# EAGLE board Validation CircuitThroughHoleMolexCondensed (EAGLE 8.3.1)
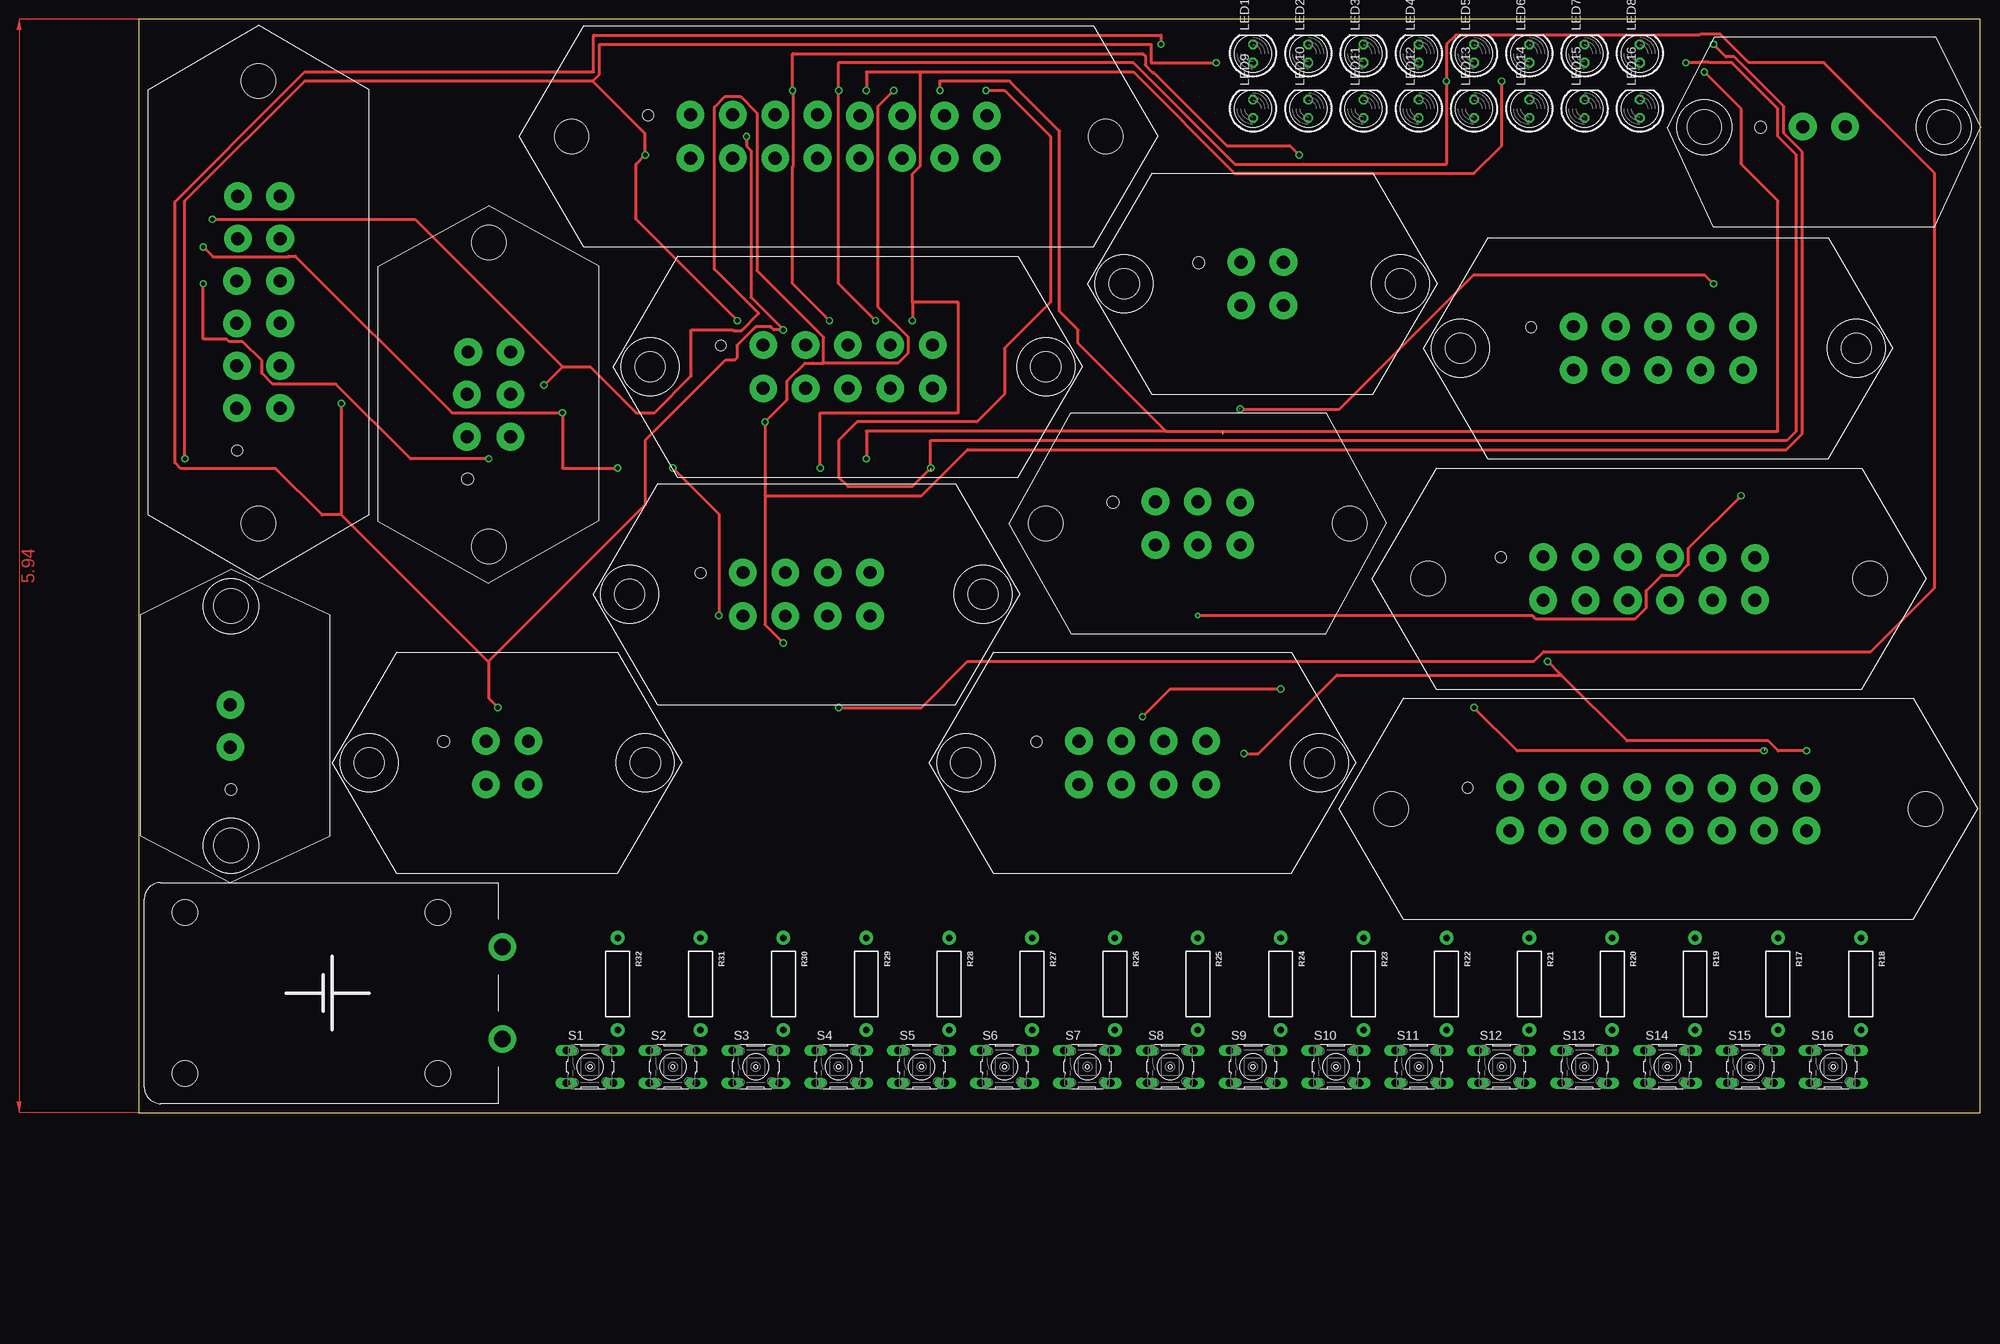
[diagram p0: board, top side]
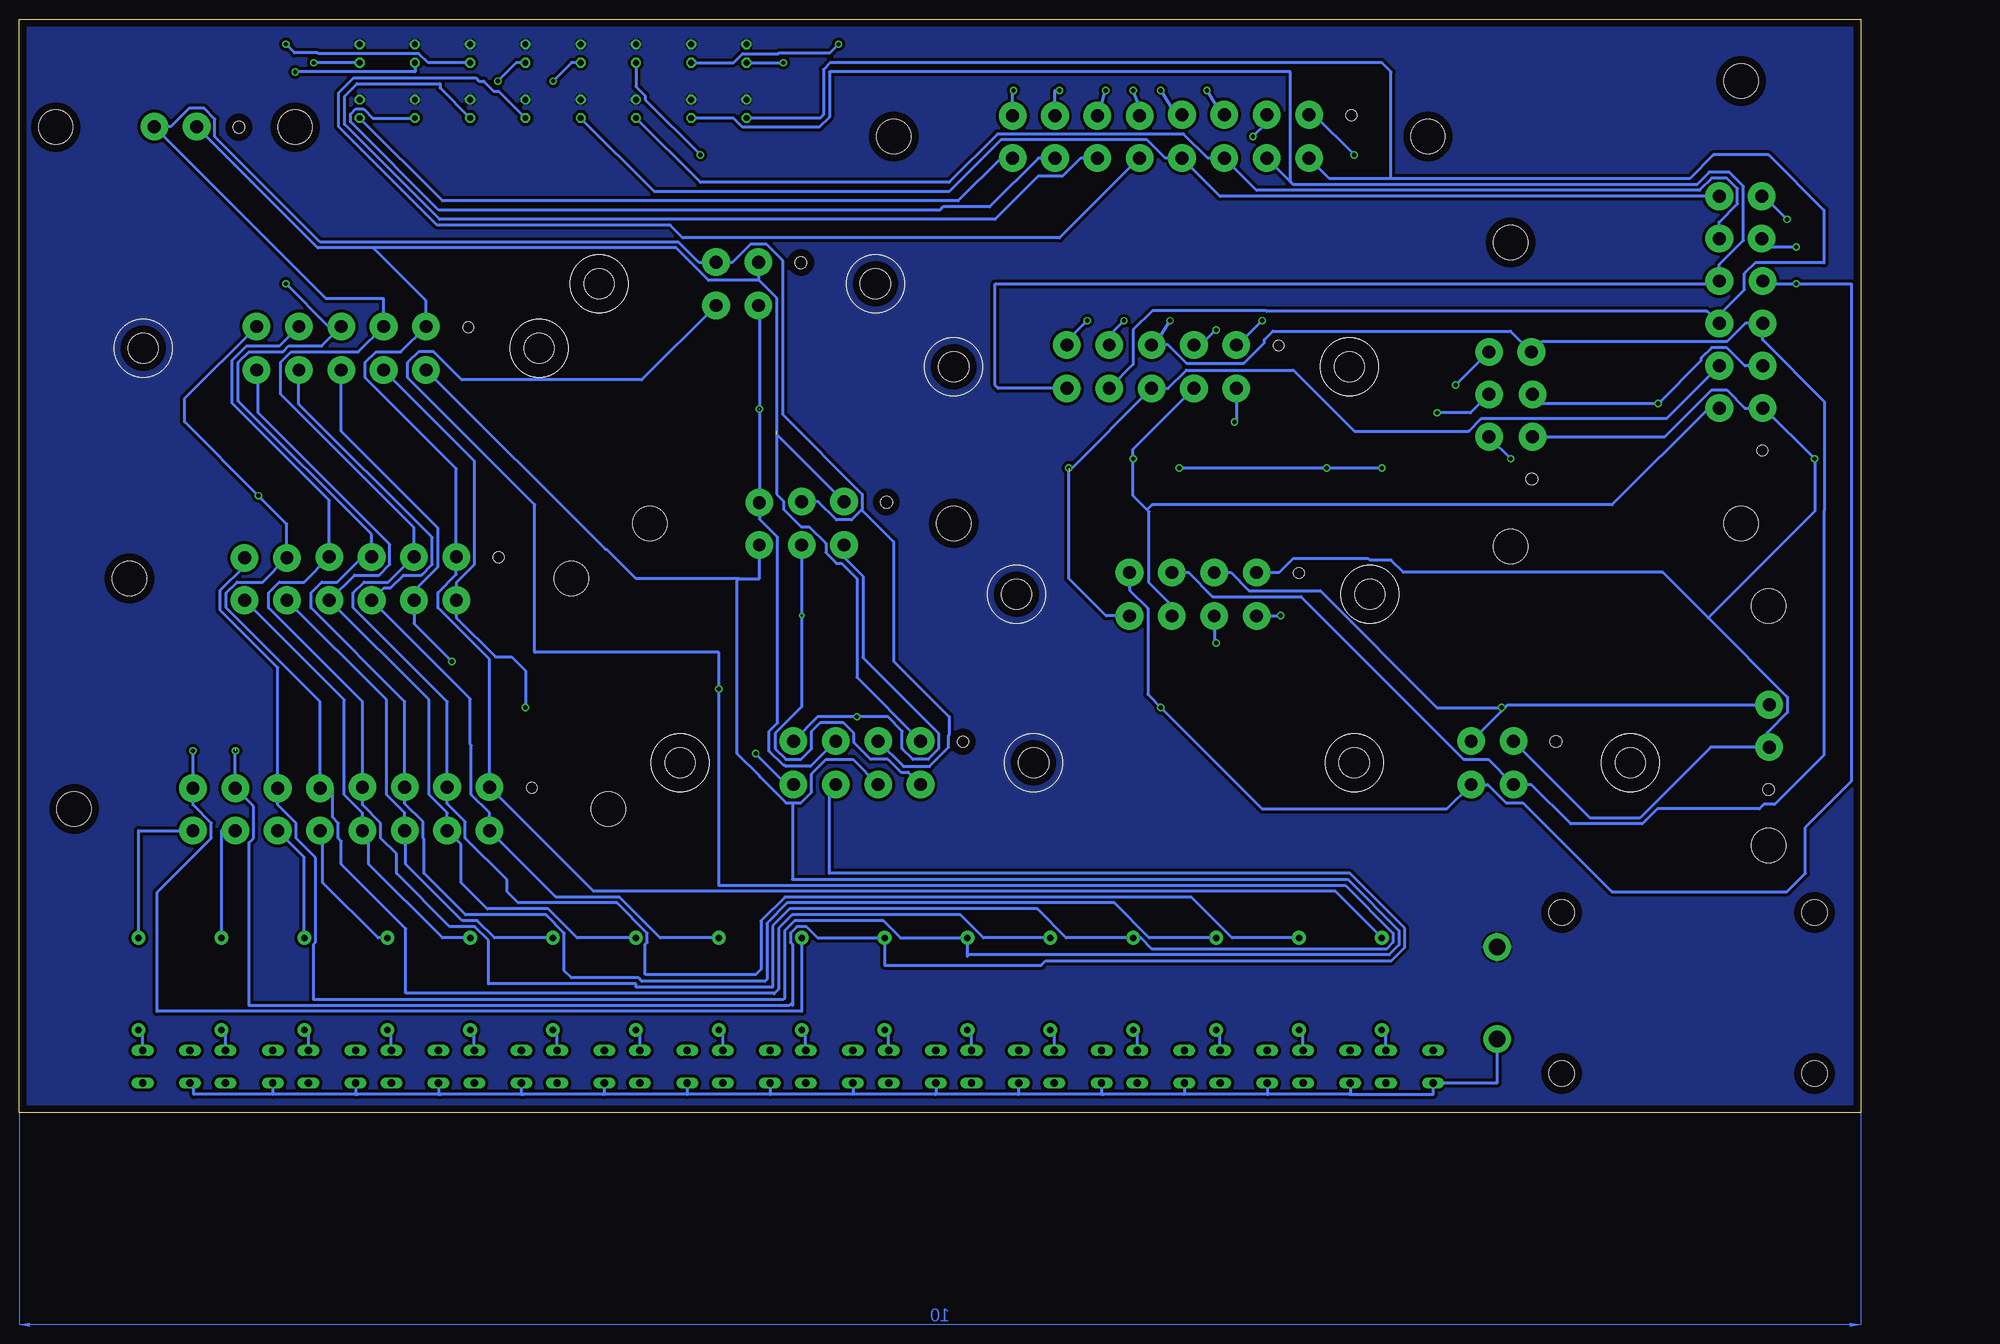
[diagram p1: board, bottom side, seen from below]

Size 253.98 x 150.8 mm. Coordinates in mm from the lower left corner, seen from the top.
Outline: 0,0 253.98,0 253.98,150.8 0,150.8 0,0
Copper layers (1*16): Top 0.035mm / dielectric 1.5mm / Bottom 0.035mm
Design rules "default *": minimum track width 6mil, minimum drill 0.35mm, track to track 16mil, track to pad 16mil, pad to pad 16mil, via to via 16mil, smd to smd 16mil, copper to edge 40mil, drill to drill 6mil, minimum pad ring 10mil, minimum via ring 8mil, stop-mask expansion 4mil, vias tented up to drill 0mil, thermal gap 10mil

## Footprints (pad centres in the part's own frame; a part is rotated, then mirrored left to right if it is on the bottom)
LED-5MM = drill 0.813 octagon: A -1.27,0; K 1.27,0
AXIAL-0.5 = drill 0.9 pad 1.88: P$1 -6.35,0; P$2 6.35,0
B3F-10XX = drill 1.016 long: 1 -3.251,2.261; 2 3.251,2.261; 3 -3.251,-2.261; 4 3.251,-2.261
MX150L_VERTICAL-4 = drill 1.778 pad 3.81: 1 -2.921,2.997; 2 2.921,2.997; 3 -2.921,-2.997; 4 2.921,-2.997 | hole 4.191: -19.05,0; 19.05,0 | hole 1.651: -8.763,2.921
MX150L_VERTICAL-6 = drill 1.778 pad 3.81: 1 -5.842,2.997; 2 0,2.997; 3 5.842,2.845; 4 -5.842,-2.997; 5 0,-2.997; 6 5.842,-2.997 | hole 1.651: -11.684,2.921 | hole 4.775: -20.955,0; 20.955,0
MX150L_VERTICAL-2 = drill 1.778 pad 3.81: 1 -2.921,0.076; 2 2.921,0.076 | hole 1.651: -8.763,0 | hole 4.775: -16.51,0; 16.51,0
MX150L_VERTICAL-8 = drill 1.778 pad 3.81: 1 -8.763,2.997; 2 -2.921,2.997; 3 2.921,2.997; 4 8.763,2.997; 5 -8.763,-2.997; 6 -2.921,-2.997; 7 2.921,-2.997; 8 8.763,-2.997 | hole 4.191: -24.371,0; 24.371,0 | hole 1.524: -14.605,2.921
MX150L_VERTICAL-10 = drill 1.778 pad 3.81: 1 -11.684,2.997; 2 -5.842,2.997; 3 0,2.997; 4 5.842,2.997; 5 11.684,2.997; 6 -11.684,-2.997; 7 -5.842,-2.997; 8 0,-2.997; 9 5.842,-2.997; 10 11.684,-2.997 | hole 4.191: -27.292,0; 27.292,0 | hole 1.524: -17.526,2.921
MX150L_VERTICAL-12 = drill 1.778 pad 3.81: 1 -14.605,2.997; 2 -8.763,2.997; 3 -2.921,2.997; 4 2.921,2.997; 5 8.763,2.845; 6 14.605,2.845; 7 -14.605,-2.997; 8 -8.763,-2.997; 9 -2.921,-2.997; 10 2.921,-2.997; 11 8.763,-2.997; 12 14.605,-2.997 | hole 1.524: -20.447,2.921 | hole 4.775: 30.48,0; -30.48,0
MX150L-VERTICAL-16 = drill 1.778 pad 3.81: 1 -20.447,2.997; 2 -14.605,2.997; 3 -8.763,2.997; 4 -2.921,2.997; 5 2.921,2.845; 6 8.763,2.845; 7 14.605,2.845; 8 20.447,2.845; 9 -20.447,-2.997; 10 -14.605,-2.997; 11 -8.763,-2.997; 12 -2.921,-2.997; 13 2.921,-2.997; 14 8.763,-2.997; 15 14.605,-2.997; 16 20.447,-2.997 | hole 1.524: -26.289,2.921 | hole 4.775: -36.83,0; 36.83,0
1291-79 = drill 2.286 pad 3.81: + 43.815,-6.35; - 43.815,6.35 | hole 3.556: 0,11.113; 0,-11.113; 34.925,-11.113; 34.925,11.113

## Placement (x,y rotation side)
LED1  [LED-5MM]  153.67,146.05 90 top
LED2  [LED-5MM]  161.29,146.05 90 top
LED3  [LED-5MM]  168.91,146.05 90 top
LED4  [LED-5MM]  176.53,146.05 90 top
LED5  [LED-5MM]  184.15,146.05 90 top
LED6  [LED-5MM]  191.77,146.05 90 top
LED7  [LED-5MM]  199.39,146.05 90 top
LED8  [LED-5MM]  207.01,146.05 90 top
LED9  [LED-5MM]  153.67,138.43 90 top
LED10  [LED-5MM]  161.29,138.43 90 top
LED11  [LED-5MM]  168.91,138.43 90 top
LED12  [LED-5MM]  176.53,138.43 90 top
LED13  [LED-5MM]  184.15,138.43 90 top
LED14  [LED-5MM]  191.77,138.43 90 top
LED15  [LED-5MM]  199.39,138.43 90 top
LED16  [LED-5MM]  207.01,138.43 90 top
R17  [AXIAL-0.5]  226.06,17.78 270 top
R18  [AXIAL-0.5]  237.49,17.78 270 top
R19  [AXIAL-0.5]  214.63,17.78 270 top
R20  [AXIAL-0.5]  203.2,17.78 270 top
R21  [AXIAL-0.5]  191.77,17.78 270 top
R22  [AXIAL-0.5]  180.34,17.78 270 top
R23  [AXIAL-0.5]  168.91,17.78 270 top
R24  [AXIAL-0.5]  157.48,17.78 270 top
R25  [AXIAL-0.5]  146.05,17.78 270 top
R26  [AXIAL-0.5]  134.62,17.78 270 top
R27  [AXIAL-0.5]  123.19,17.78 270 top
R28  [AXIAL-0.5]  111.76,17.78 270 top
R29  [AXIAL-0.5]  100.33,17.78 270 top
R30  [AXIAL-0.5]  88.9,17.78 270 top
R31  [AXIAL-0.5]  77.47,17.78 270 top
R32  [AXIAL-0.5]  66.04,17.78 270 top
S1  [B3F-10XX]  62.23,6.35 0 top
S2  [B3F-10XX]  73.66,6.35 0 top
S3  [B3F-10XX]  85.09,6.35 0 top
S4  [B3F-10XX]  96.52,6.35 0 top
S5  [B3F-10XX]  107.95,6.35 0 top
S6  [B3F-10XX]  119.38,6.35 0 top
S7  [B3F-10XX]  130.81,6.35 0 top
S8  [B3F-10XX]  142.24,6.35 0 top
S9  [B3F-10XX]  153.67,6.35 0 top
S10  [B3F-10XX]  165.1,6.35 0 top
S11  [B3F-10XX]  176.53,6.35 0 top
S12  [B3F-10XX]  187.96,6.35 0 top
S13  [B3F-10XX]  199.39,6.35 0 top
S14  [B3F-10XX]  210.82,6.35 0 top
S15  [B3F-10XX]  222.25,6.35 0 top
S16  [B3F-10XX]  233.68,6.35 0 top
U$1  MX150L-4PINS  [MX150L_VERTICAL-4]  154.94,114.3 0 top
U$2  MX150L-6PINS  [MX150L_VERTICAL-6]  146.05,81.28 0 top
U$3  MX150L-2PINS  [MX150L_VERTICAL-2]  232.41,135.89 0 top
U$4  MX150L-8PINS  [MX150L_VERTICAL-8]  138.43,48.26 0 top
U$5  MX150L-10PINS  [MX150L_VERTICAL-10]  209.55,105.41 0 top
U$6  MX150L-12PINS  [MX150L_VERTICAL-12]  208.28,73.66 0 top
U$7  MX150L-16PINS  [MX150L-VERTICAL-16]  209.55,41.91 0 top
U$8  MX150L-16PINS  [MX150L-VERTICAL-16]  96.52,134.62 0 top
U$9  MX150L-12PINS  [MX150L_VERTICAL-12]  16.51,111.76 90 top
U$10  MX150L-10PINS  [MX150L_VERTICAL-10]  97.79,102.87 0 top
U$11  MX150L-8PINS  [MX150L_VERTICAL-8]  92.08,71.5 0 top
U$12  MX150L-6PINS  [MX150L_VERTICAL-6]  48.26,99.06 90 top
U$13  MX150L-4PINS  [MX150L_VERTICAL-4]  50.8,48.26 0 top
U$14  MX150L-2PINS  [MX150L_VERTICAL-2]  12.7,53.34 90 top
U$16  1291-79  [1291-79]  6.35,16.51 0 top

## Library data of the parts
LED1-LED16 R17-R32 U$1-U$14 U$16 = HyTechDevices
S1-S16 = HyTechDevices; MPN: B3F-1000; OC_FARNELL: 176432; OC_NEWARK: 36M3542

## Nets
GND: LED1.A U$8.1 U$9.1 U$10.1 U$11.1 U$12.1 U$13.1 U$14.1
N$1: S1.3 S2.3 S3.3 S4.3 S5.3 S6.3 S7.3 S8.3 S9.3 S10.3 S11.3 S12.3 S13.3 S14.3 S15.3 S16.3 U$16.+
N$3: LED16.A U$8.16
N$4: LED8.A U$8.8 U$9.8 U$10.8 U$11.8
N$7: LED15.A U$8.15
N$8: LED14.A U$8.14
N$9: LED13.A U$8.13
N$10: LED12.A U$8.12 U$9.12
N$11: LED11.A U$8.11 U$9.11
N$12: LED10.A U$8.10 U$9.10 U$10.10
N$13: LED9.A U$8.9 U$9.9 U$10.9
N$15: LED7.A U$8.7 U$9.7 U$10.7 U$11.7
N$16: LED6.A U$8.6 U$9.6 U$10.6 U$11.6 U$12.6
N$17: LED5.A U$8.5 U$9.5 U$10.5 U$11.5 U$12.5
N$18: LED4.A U$8.4 U$9.4 U$10.4 U$11.4 U$12.4 U$13.4
N$19: LED3.A U$8.3 U$9.3 U$10.3 U$11.3 U$12.3 U$13.3
N$20: LED2.A U$8.2 U$9.2 U$10.2 U$11.2 U$12.2 U$13.2 U$14.2
N$21: LED1.K LED2.K LED3.K LED4.K LED5.K LED6.K LED7.K LED8.K LED9.K LED10.K LED11.K LED12.K LED13.K LED14.K LED15.K LED16.K U$16.-
N$40: R32.P$2 S1.2
N$53: R31.P$2 S2.2
N$54: R30.P$2 S3.2
N$55: R29.P$2 S4.2
N$56: R28.P$2 S5.2
N$57: R27.P$2 S6.2
N$58: R26.P$2 S7.2
N$59: R25.P$2 S8.2
N$60: R24.P$2 S9.2
N$61: R23.P$2 S10.2
N$62: R22.P$2 S11.2
N$63: R21.P$2 S12.2
N$64: R20.P$2 S13.2
N$65: R19.P$2 S14.2
N$66: R17.P$2 S15.2
N$67: R18.P$2 S16.2
PIN1: R32.P$1 U$1.1 U$2.1 U$3.1 U$4.1 U$5.1 U$6.1 U$7.1
PIN2: R31.P$1 U$1.2 U$2.2 U$3.2 U$4.2 U$5.2 U$6.2 U$7.2
PIN3: R30.P$1 U$1.3 U$2.3 U$4.3 U$5.3 U$6.3 U$7.3
PIN4: R29.P$1 U$1.4 U$2.4 U$4.4 U$5.4 U$6.4 U$7.4
PIN5: R28.P$1 U$2.5 U$4.5 U$5.5 U$6.5 U$7.5
PIN6: R27.P$1 U$2.6 U$4.6 U$5.6 U$6.6 U$7.6
PIN7: R26.P$1 U$4.7 U$5.7 U$6.7 U$7.7
PIN8: R25.P$1 U$4.8 U$5.8 U$6.8 U$7.8
PIN9: R24.P$1 U$5.9 U$6.9 U$7.9
PIN10: R23.P$1 U$5.10 U$6.10 U$7.10
PIN11: R22.P$1 U$6.11 U$7.11
PIN12: R21.P$1 U$6.12 U$7.12
PIN13: R20.P$1 U$7.13
PIN14: R19.P$1 U$7.14
PIN15: R17.P$1 U$7.15
PIN16: R18.P$1 U$7.16

## Tracks (layer width: path | path; a pad name or v marks a point on that pad's centre or on a via)
GND  (via drill 0.6)
  Top 0.406: v6.35,90.17 6.35,125.73 22.86,142.24 62.6,142.24 | 62.6,142.24 69.85,135 v69.85,132.08 68.58,130.81 68.58,123.19 v82.55,109.22 | 62.6,142.24 | 63.06,142.7 63.54,143.17 63.54,147.32 139.61,147.32 139.61,144.78 v148.59,144.78 | 63.06,142.7 | 63.06,142.7 62.6,142.24
  Bottom 0.406: 12.9,50.42 U$14.1 | 12.9,50.42 20.7,50.42 30.48,40.64 37.26,40.64 U$13.1 | U$11.1 80.2,74.5 78.29,76.4 67.92,76.4 67.72,76.2 64.77,76.2 63.07,74.5 27.3,74.5 21.04,68.23 | 21.04,68.23 10.11,57.3 10.11,55.22 12.9,52.43 12.9,50.42 | U$12.1 27,93.22 20.55,99.67 18.47,99.67 15.95,97.16 U$9.1 13.34,97.16 v6.35,90.17 6.35,82.92 21.04,68.23 | LED1.A v148.59,144.78 | U$10.1 85.9,105.87 v82.55,109.22 | U$8.1 75.39,137.62 v69.85,132.08
N$1
  Bottom 0.406: U$16.+ 50.16,4.09 S1.3 58.98,2.54 70.57,2.54 | S16.3 229.87,4.09 229.87,2.54 218.97,2.54 | 207.25,2.54 218.97,2.54 | 195.78,2.54 207.25,2.54 | 184.36,2.54 195.78,2.54 | 173.48,2.54 184.36,2.54 | 161.89,2.54 173.48,2.54 | 150.34,2.54 161.89,2.54 | 139,2.54 150.34,2.54 | 127.66,2.54 139,2.54 | 116.27,2.54 127.66,2.54 | 104.43,2.54 116.27,2.54 | 93.34,2.54 104.43,2.54 | 81.75,2.54 93.34,2.54 | 70.57,2.54 81.75,2.54 | S15.3 219,2.54 218.97,2.54 | S14.3 207.57,2.54 207.25,2.54 | S13.3 196.14,2.54 195.78,2.54 | S12.3 184.71,2.54 184.36,2.54 | S11.3 173.28,2.54 173.48,2.54 | S10.3 161.85,2.54 161.89,2.54 | S9.3 150.42,2.54 150.34,2.54 | S8.3 138.99,2.54 139,2.54 | S7.3 127.56,2.54 127.66,2.54 | S6.3 116.13,2.54 116.27,2.54 | S5.3 104.7,2.54 104.43,2.54 | S4.3 93.27,2.54 93.34,2.54 | S3.3 81.84,2.54 81.75,2.54 | S2.3 70.41,2.54 70.57,2.54
N$3
  Bottom 0.406: U$8.16 118.57,131.62 124.46,125.73 195.58,125.73 LED16.A
N$4  (via drill 0.6)  (1 unrouted)
  Top 0.406: v116.84,140.97 119.38,140.97 125.73,134.62 125.73,111.76 119.38,105.41 119.38,99.06 115.57,95.25 99.06,95.25 96.52,92.71 96.52,87.63 97.79,86.36 106.68,86.36 v109.22,88.9 109.22,92.71 227.33,92.71 228.6,93.98 228.6,132.08 226.06,134.62 226.06,138.43 219.71,144.78 216.55,144.78 216.46,144.87 215.34,144.87 215.25,144.78 v213.36,144.78
  Bottom 0.406: U$11.8 104.06,68.5 109.22,73.66 109.22,88.44 U$10.8 95.5,99.87 92.99,102.39 78.26,102.39 69.85,93.98 54.05,93.98 52.3,95.73 26.77,95.73 U$9.8 | U$8.8 116.97,140.97 v116.84,140.97 | LED8.A v213.36,144.78
N$7
  Bottom 0.406: U$8.15 113.41,131.62 120.12,124.92 126.54,124.92 127,124.46 196.11,124.46 208.28,136.63 208.28,137.69 207.54,138.43 206.48,138.43 205.21,137.16 LED15.A
N$8
  Bottom 0.406: U$8.14 107.57,131.62 110.08,129.11 113.46,129.11 119.38,123.19 195.99,123.19 209.09,136.3 209.09,140.16 207.37,141.88 195.94,141.88 195.94,141.33 LED14.A
N$9
  Bottom 0.406: U$8.13 99.52,131.62 110.49,120.65 162.47,120.65 164.2,122.38 196.32,122.38 209.91,135.96 209.91,139.7 | 209.91,139.7 209.91,139.75 | 209.91,139.7 209.91,140.61 207.82,142.7 190.96,142.7 190.5,142.24 189.88,142.24 188.52,140.88 187.87,140.88 LED13.A
N$10
  Bottom 0.406: U$9.12 88.34,126.36 U$8.12 95.89,131.62 98.4,134.14 118.59,134.14 125.73,127 166.37,127 LED12.A
N$11
  Bottom 0.406: U$9.11 19.51,122.81 16.99,125.32 16.99,127.41 18.47,128.88 20.55,128.88 22.25,127.18 83.31,127.18 U$8.11 90.04,131.62 93.37,134.95 119.05,134.95 125.73,128.27 160.02,128.27 LED11.A
N$12
  Bottom 0.406: 78.65,128.36 78.28,127.99 22.59,127.99 20.89,129.69 18.13,129.69 16.18,127.74 16.18,120.29 19.51,116.97 19.51,114.78 | 78.65,128.36 U$8.10 | 19.51,114.78 U$9.10 | 78.65,128.36 78.65,143.51 142.24,143.51 142.24,137.28 143.63,135.89 154.2,135.89 155.47,137.16 LED10.A | U$10.10 118.92,99.87 119.38,100.33 119.38,114.3 19.98,114.3 19.51,114.78
N$13
  Bottom 0.406: U$10.9 100.33,103.17 100.33,107.95 97.7,110.58 81.99,110.58 81.9,110.49 21.16,110.49 U$9.9 19.51,110.03 16.03,113.51 16.03,115.72 14.55,117.2 5.08,117.2 5.08,124.46 12.7,132.08 20.32,132.08 23.6,128.8 64.77,128.8 | 64.77,128.8 73.25,128.8 U$8.9 | 64.77,128.8 64.77,143.51 66.04,144.78 142.12,144.78 143.05,143.85 143.05,137.62 143.51,137.16 LED9.A
N$15  (via drill 0.6)
  Top 0.406: v100.33,90.17 100.33,93.98 141.67,93.98 | v110.49,140.97 110.49,142.24 120.11,142.24 127,135.35 127,110.49 129.54,107.95 129.54,106.11 141.67,93.98 | 141.67,93.98 226.06,93.98 226.06,125.73 220.98,130.81 220.98,138.43 v215.9,143.51
  Bottom 0.406: 98.4,83.16 98.15,82.91 98.15,73.08 95,69.93 U$11.7 | 98.4,83.16 100.33,85.09 v100.33,90.17 100.33,91.49 U$10.7 | U$9.7 20.95,97.16 34.29,83.82 97.74,83.82 98.4,83.16 | U$8.7 111.12,140.97 v110.49,140.97 | LED7.A 199.39,143.51 v215.9,143.51
N$16  (via drill 0.6)
  Top 0.406: v10.16,123.19 38.1,123.19 58.42,102.87 | 58.42,102.87 v55.88,100.33 | 86.36,85.09 v86.36,95.25 89.43,98.32 89.43,100.91 91.87,103.35 92.99,103.35 93.01,103.37 94.46,103.37 | 86.36,85.09 86.36,67.31 v88.9,64.77 | 58.42,102.87 62.23,102.87 68.58,96.52 71.12,96.52 76.2,101.6 76.2,107.95 81.9,107.95 81.99,107.86 83.11,107.86 85.48,110.22 79.4,116.3 79.4,138.66 80.87,140.13 82.96,140.13 85.24,137.85 85.24,116.13 94.46,106.91 94.46,103.37 | 86.36,85.09 107.95,85.09 114.3,91.44 227.21,91.44 229.41,93.64 229.41,132.49 226.87,135.03 226.87,138.77 220.05,145.59 218.9,145.59 v217.17,147.32 | v104.14,140.97 101.96,138.79 101.96,111.1 106.15,106.91 106.15,104.83 104.67,103.35 95.25,103.35 95.25,103.37 94.46,103.37
  Bottom 0.406: LED6.A 197.59,144.78 198.86,146.05 212.71,146.05 212.8,146.14 215.99,146.14 v217.17,147.32 | U$12.6 51.31,104.9 v55.88,100.33 | U$9.6 13.34,126.36 v10.16,123.19 | U$10.6 86.11,95.5 v86.36,95.25 | U$11.6 89.15,65.02 v88.9,64.77 | U$8.6 105.11,137.47 v104.14,140.97
N$17  (via drill 0.6)
  Top 0.406: v187.96,142.24 187.96,133.35 184.15,129.54 151.13,129.54 137.16,143.51 107.98,143.51 | v8.89,119.38 10.26,118.01 20.55,118.01 20.65,118.11 21.59,118.11 43.18,96.52 v58.42,96.52 58.42,88.9 v66.04,88.9 | 107.98,143.51 100.33,143.51 v100.33,140.97 | 106.68,111.73 v106.68,109.22 | 106.68,111.73 106.68,129.46 107.8,130.58 107.8,143.33 107.98,143.51 | v93.98,88.9 93.98,96.52 113.03,96.52 113.03,111.73 106.68,111.73 | v80.01,68.58 80.01,82.55 v73.66,88.9
  Bottom 0.406: LED5.A 185.42,144.78 v187.96,142.24 | U$8.5 99.44,138.81 v100.33,140.97 | U$10.5 109.47,106.43 v106.68,109.22 | U$9.5 13.66,119.38 v8.89,119.38 | U$12.5 53.8,96.52 v58.42,96.52 | v66.04,88.9 v73.66,88.9 v93.98,88.9 | U$11.5 80.09,68.5 v80.01,68.58
N$18  (via drill 0.6)
  Top 0.406: v101.6,109.22 96.52,114.3 v96.52,140.97 96.52,144.78 137.16,144.78 151.22,130.72 160.58,130.72 160.67,130.81 180.34,130.81 v180.34,142.24 180.34,147.32 181.61,148.59 215.25,148.59 215.34,148.68 218.11,148.68 222.01,144.78 232.41,144.78 247.65,129.54 247.65,72.39 238.85,63.59 193.75,63.59 192.39,62.23 114.3,62.23 107.95,55.88 v96.52,55.88 | v48.26,90.17 37.48,90.17 27.17,100.48 18.47,100.48 16.99,101.95 16.99,103.66 14.33,106.32 12.47,106.32 12.12,106.68 8.89,106.68 v8.89,114.3
  Bottom 0.406: U$11.4 100.84,72.06 98.32,69.55 98.32,57.68 v96.52,55.88 82.55,41.91 57.07,41.91 U$13.4 51.44,45.26 48.92,42.75 46.56,42.75 34.29,30.48 10.16,30.48 7.62,33.02 7.62,39.37 1.27,45.72 1.27,114.3 v8.89,114.3 13.51,114.3 U$9.4 | U$8.4 94.44,137.62 v96.52,140.97 | LED4.A 177.8,144.78 v180.34,142.24 | U$10.4 103.63,107.19 v101.6,109.22 | U$12.4 51.26,93.17 v48.26,90.17
N$19  (via drill 0.6)
  Top 0.406: v160.02,132.08 158.75,133.35 150.04,133.35 139.97,143.42 139.82,143.42 138.8,144.44 138.8,145.68 138.43,146.05 90.17,146.05 v90.17,140.97 90.27,140.87 90.27,130.58 90.17,130.48 90.17,114.3 v95.25,109.22
  Bottom 0.406: U$11.3 92.71,74.5 89.38,71.17 77.19,71.17 54.76,48.74 51.36,48.74 U$13.3 45.44,45.26 40.01,39.83 30.14,39.83 28.06,41.91 13.97,41.91 13.35,42.53 11.85,42.53 5.08,49.3 5.08,83.04 4.99,83.13 4.99,98.03 13.51,106.55 U$9.3 15.92,108.84 18.43,106.32 43.99,106.32 U$12.3 48.28,107.77 81.08,107.77 82.25,106.61 82.25,106.17 85.06,103.35 92.99,103.35 95.5,105.87 U$10.3 97.33,105.87 v95.25,109.22 | v160.02,132.08 167.64,139.7 167.64,140.23 168.91,141.5 LED3.A | U$8.3 88.09,137.62 v90.17,140.97
N$20  (via drill 0.6)
  Top 0.406: v83.82,134.62 83.82,133.27 84.43,132.66 84.43,112.42 v88.9,107.95 87.58,107.95 87.15,108.38 85.06,108.38 82.5,105.82 82.55,105.78 82.55,104.14 82.22,103.81 80.95,103.81 69.85,92.71 69.85,83.82 48.26,62.23 48.26,62.11 | 48.26,62.11 48.26,57.15 v49.53,55.88 | v27.94,97.79 27.94,82.43 | 27.94,82.43 48.26,62.11 | 27.94,82.43 25.27,82.43 18.89,88.81 5.79,88.81 4.99,89.61 4.99,125.62 20.12,140.75 20.12,140.77 22.86,143.51 62.73,143.51 62.73,148.59 140.97,148.59 v140.97,147.32
  Bottom 0.406: U$14.2 48.72,56.26 49.1,55.88 | 49.1,55.88 U$13.2 | U$11.2 86.87,74.5 84.35,71.98 74.52,71.98 58.42,55.88 v49.53,55.88 49.1,55.88 | LED2.A 155.47,144.78 154.2,146.05 149.24,146.05 149.15,146.14 142.15,146.14 v140.97,147.32 | U$8.2 81.92,136.53 v83.82,134.62 | U$10.2 90.98,105.87 v88.9,107.95 | U$12.2 43.99,97.79 v27.94,97.79 22.02,103.71 22.02,104.04 20.55,105.51 18.47,105.51 15.95,103 U$9.2
N$21
  pour Bottom: 0,0 254,0 254,151.13 0,151.13
N$40
  Bottom 0.406: S1.2 65.48,10.87 R32.P$2
N$53
  Bottom 0.406: S2.2 76.91,10.87 R31.P$2
N$54
  Bottom 0.406: S3.2 88.34,10.87 R30.P$2
N$55
  Bottom 0.406: S4.2 99.77,10.87 R29.P$2
N$56
  Bottom 0.406: S5.2 111.2,10.87 R28.P$2
N$57
  Bottom 0.406: S6.2 122.63,10.87 R27.P$2
N$58
  Bottom 0.406: S7.2 134.06,10.87 R26.P$2
N$59
  Bottom 0.406: S8.2 145.49,10.87 R25.P$2
N$60
  Bottom 0.406: S9.2 156.92,10.87 R24.P$2
N$61
  Bottom 0.406: S10.2 168.35,10.87 R23.P$2
N$62
  Bottom 0.406: S11.2 179.78,10.87 R22.P$2
N$63
  Bottom 0.406: S12.2 191.21,10.87 R21.P$2
N$64
  Bottom 0.406: S13.2 202.64,10.87 R20.P$2
N$65
  Bottom 0.406: S14.2 214.07,10.87 R19.P$2
N$66
  Bottom 0.406: S15.2 225.5,10.87 R17.P$2
N$67
  Bottom 0.406: S16.2 236.93,10.87 R18.P$2
PIN1  (1 unrouted)
  Bottom 0.406: R32.P$1 72.47,30.56 174.75,30.56 U$7.1 189.1,62.53 196.19,69.62 196.19,71.74 193.68,74.25 U$6.1 193.68,88.82 206.22,101.37 206.22,103.45 204.75,104.93 201.35,104.93 U$5.1 197.87,111.96 205.15,119.25 | U$1.1 152.02,114.86 151.94,114.78 | 151.94,114.78 149.5,112.34 149.5,93.57 U$2.1 | 149.5,93.98 149.5,85.29 148.56,84.35 148.56,83.24 146.13,80.8 145.01,80.8 142.72,78.51 142.72,77.24 141.25,75.77 140.54,75.77 138.43,73.66 138.43,60.02 U$4.1 | 205.15,119.25 163.37,119.25 158.9,114.78 151.94,114.78 | 205.15,119.25 212.77,119.25 U$3.1
PIN2
  Bottom 0.406: R31.P$1 86.71,24.13 92.32,29.74 148.38,29.74 151.66,26.45 151.66,19.79 152.4,19.05 167.64,19.05 167.64,23.21 167.36,23.49 167.36,24.77 171.52,28.93 185.14,28.93 186.69,30.48 186.69,32.13 192.43,37.87 192.43,40.11 194.94,42.62 U$7.2 194.94,56.69 207.87,69.62 207.87,71.7 206.4,73.18 203.07,73.18 199.59,76.66 U$6.2 199.52,80.7 217.91,99.08 217.91,103.45 216.43,104.93 207.19,104.93 U$5.2 203.71,112.27 211.63,112.27 U$3.2 233.04,135.97 230.53,138.48 228.45,138.48 226.97,137.01 226.97,134.6 212.44,120.06 163.03,120.06 160.27,117.3 U$1.2 155.57,117.3 153.06,119.81 150.98,119.81 148.69,117.53 148.69,96.32 137.69,85.32 137.69,83.24 137.77,83.16 | 137.77,83.16 139.17,81.76 141.25,81.76 143.76,84.28 U$2.2 | 137.77,83.16 133.35,78.74 133.35,62.23 125.73,54.61 125.73,52.08 125.81,52 125.81,50.38 | 125.81,50.38 125.81,50.36 | U$4.2 132.03,47.78 128.41,47.78 125.81,50.38
PIN3  (via drill 0.6)  (1 unrouted)
  Top 0.406: 151.89,97.03 165.61,97.03 184.15,115.57 215.9,115.57 v217.17,114.3
  Bottom 0.406: R30.P$1 98.14,24.13 102.94,28.93 148.04,28.93 150.85,26.12 150.85,18.41 151.13,18.14 168.12,18.14 168.57,18.59 177.8,18.59 178.79,19.58 178.79,24.77 181.32,27.3 192.41,27.3 198.12,33.02 198.12,37.72 198.27,37.87 198.27,40.11 200.79,42.62 U$7.3 200.79,56.69 213.72,69.62 213.72,71.7 212.24,73.18 210.09,73.18 206.61,76.66 U$6.3 205.36,79.75 223.75,98.14 223.75,103.45 222.28,104.93 217.58,104.93 216.77,105.74 212.22,105.74 U$5.3 211.28,108.41 v217.17,114.3 | U$1.3 151.89,111.18 v151.89,97.05 U$2.3 151.89,81.84 149.38,79.32 149.38,53.78 150.52,52.63 150.52,49.88 148.57,47.93 148.39,47.93 148.24,47.78 144.83,47.78 U$4.3
PIN4  (via drill 0.6)
  Top 0.406: v157.48,58.42 142.24,58.42 v138.43,54.61
  Bottom 0.406: U$5.4 218.06,105.74 222.61,105.74 224.56,103.79 224.56,97.8 211.2,84.44 U$6.4 214.68,73.18 218.09,73.18 219.56,71.7 219.56,69.62 206.63,56.69 U$7.4 206.63,42.47 204.11,39.95 204.11,37.87 201.93,35.69 201.93,33.02 194.59,25.68 191.13,25.68 189.23,23.78 189.23,17.78 168.91,17.78 168.91,17.32 150.09,17.32 150.04,17.38 150.04,25.78 147.7,28.12 113.56,28.12 109.57,24.13 R29.P$1 99.29,24.13 97.74,22.58 65.4,22.58 64.49,23.49 64.49,24.77 71.09,31.37 157.48,31.37 v157.48,58.42 157.48,63.5 182.88,63.5 182.88,83.87 200.38,101.37 200.38,103.45 198.91,104.93 196.82,104.93 192.94,101.05 168.12,101.05 U$1.4 | U$2.4 140.21,76.59 137.62,74 137.62,62.76 127.15,52.3 127.15,50.22 128.62,48.74 130.71,48.74 132.18,50.22 132.18,52.62 134.17,54.61 v138.43,54.61 143.84,54.61 U$4.4
PIN5  (via drill 0.35, 0.6)
  Top 0.406: v146.05,68.58 192.2,68.58 192.63,68.15 206.4,68.15 207.87,69.62 207.87,71.98 210.03,74.14 212.24,74.14 213.72,75.62 213.72,77.83 v220.98,85.09
  Bottom 0.406: R28.P$1 121,24.13 124.17,27.3 147.37,27.3 149.22,25.45 149.22,17.04 149.86,16.41 149.86,16.51 200.66,16.51 200.66,25.4 209.55,34.29 209.55,37.47 209.96,37.87 209.96,39.95 210.73,40.73 210.73,44.76 U$7.5 212.47,56.69 225.4,69.62 225.4,71.7 223.93,73.18 220.37,73.18 U$6.5 217.04,81.15 v220.98,85.09 231.14,95.25 231.14,98.5 U$5.5 | U$4.5 131.37,46.97 132.37,46.97 134.14,48.74 136.55,48.74 138.84,51.03 138.84,52.3 140.31,53.77 143.48,53.77 143.5,53.8 144.68,52.62 144.68,50.22 146.15,48.74 148.24,48.74 149.71,50.22 149.71,52.3 146.05,55.96 v146.05,68.58 U$2.5
PIN6
  Bottom 0.406: U$6.6 222.88,75.37 226.21,72.04 226.21,69.28 218.31,61.38 U$7.6 218.31,42.47 215.8,39.95 215.8,37.87 213.08,35.15 213.08,23.49 213.36,23.21 213.36,15.6 148.59,15.6 148.41,15.77 148.41,25.11 147.03,26.49 134.79,26.49 132.43,24.13 R27.P$1 123.19,21.56 122.98,21.77 65.06,21.77 63.68,23.15 63.68,25.11 70.75,32.18 147.32,32.18 147.32,42.75 | 147.32,42.75 148.24,42.75 151.8,46.32 | 147.32,42.75 146.15,42.75 144.68,44.22 144.68,46.78 142.72,48.74 138.99,48.74 U$4.6 | U$2.6 151.89,73.64 151.91,73.66 154.67,73.66 | 151.89,46.41 151.8,46.32 | U$5.6 173.13,77.67 172.92,77.67 168.91,73.66 154.67,73.66 | 151.8,46.32 151.8,46.39 154.94,49.53 154.94,73.39 154.67,73.66
PIN7  (via drill 0.6)  (1 unrouted)
  Top 0.406: v184.15,55.88 190.12,49.91 v224.13,49.91 224.16,49.91
  Bottom 0.406: 147.32,15.24 147.32,23.21 147.6,23.49 147.6,24.77 146.69,25.68 145.41,25.68 143.86,24.13 R26.P$1 134.62,20.32 113.03,20.32 112.39,20.95 64.72,20.95 62.87,22.82 62.87,25.45 70.44,33.02 142.24,33.02 142.24,45.26 U$4.7 | 147.32,15.24 147.32,14.78 | 147.32,15.24 147.78,14.78 222.25,14.78 222.25,37.26 221.64,37.87 221.64,42.24 U$7.7 224.16,50.16 | U$5.7 191.16,89.86 191.16,75.62 193.68,73.1 U$6.7 193.68,68.26 188.29,62.87 186.06,62.87 184.15,60.96 v184.15,55.88
PIN8  (via drill 0.6)
  Top 0.406: v230,49.91 226.08,49.91 224.72,51.27 205.27,51.27 196.19,60.35 | 196.19,60.35 v194.31,62.23 | v152.4,49.53 154.38,49.53 165.2,60.35 196.19,60.35
  Bottom 0.406: R25.P$1 146.05,13.97 234.95,13.97 234.95,30.4 227.48,37.87 227.48,39.95 230,42.47 U$7.8 v230,49.91 230,50.04 | U$5.8 209.55,93.98 196.19,80.62 196.19,75.28 199.52,71.95 U$6.8 199.52,67.44 v194.31,62.23 | U$4.8 148.13,45.26 v152.4,49.53
PIN9
  Bottom 0.406: R24.P$1 165.57,24.13 171.18,29.74 179.93,29.74 U$7.9 189.1,41.35 191.62,43.87 191.62,50.65 191.77,50.8 191.77,57.07 U$6.9 203.66,72.36 202.74,72.36 200.96,74.14 198.47,74.14 197,75.62 197,79.33 215.39,97.72 U$5.9
PIN10
  Bottom 0.406: 194.94,38.96 U$7.10 | 194.94,38.96 194.94,41.35 197.46,43.87 197.46,56.92 U$6.10 207.72,74.14 204.32,74.14 202.84,75.62 202.84,78.38 220.98,96.52 220.98,102.16 U$5.10 | R23.P$1 177,24.13 180.99,28.12 189.41,28.12 193.04,31.75 193.04,37.06 194.94,38.96
PIN11
  Bottom 0.406: U$6.11 203.3,56.92 203.3,43.87 200.79,41.35 U$7.11 200.66,38.79 200.66,34.29 192.86,26.49 190.79,26.49 188.43,24.13 R22.P$1
PIN12
  Bottom 0.406: U$6.12 209.14,56.92 209.14,43.83 206.63,41.32 U$7.12 205.74,38.02 205.74,34.29 195.58,24.13 R21.P$1
PIN13
  Bottom 0.406: R20.P$1 204.47,24.13 212.09,31.75 212.09,38.53 U$7.13
PIN14
  Bottom 0.406: R19.P$1 214.63,35.23 U$7.14
PIN15
  Bottom 0.406: R17.P$1 226.06,38.91 U$7.15
PIN16
  Bottom 0.406: R18.P$1 237.49,38.91 U$7.16
(copper drawn outside any net)
  shapes: Bottom area x1, Top area x1